# Altium PCB SUPPLY.PcbDoc
Units mil, origin at the board's own origin, x right, y up, seen from the top; angles counter-clockwise.
Board outline 4740 x 2575 mil, 2 copper layers (Top Layer, Bottom Layer); 88 components, 53 nets, 247 pads, 13 vias.
Unrouted connection lines stored in the file: 1.
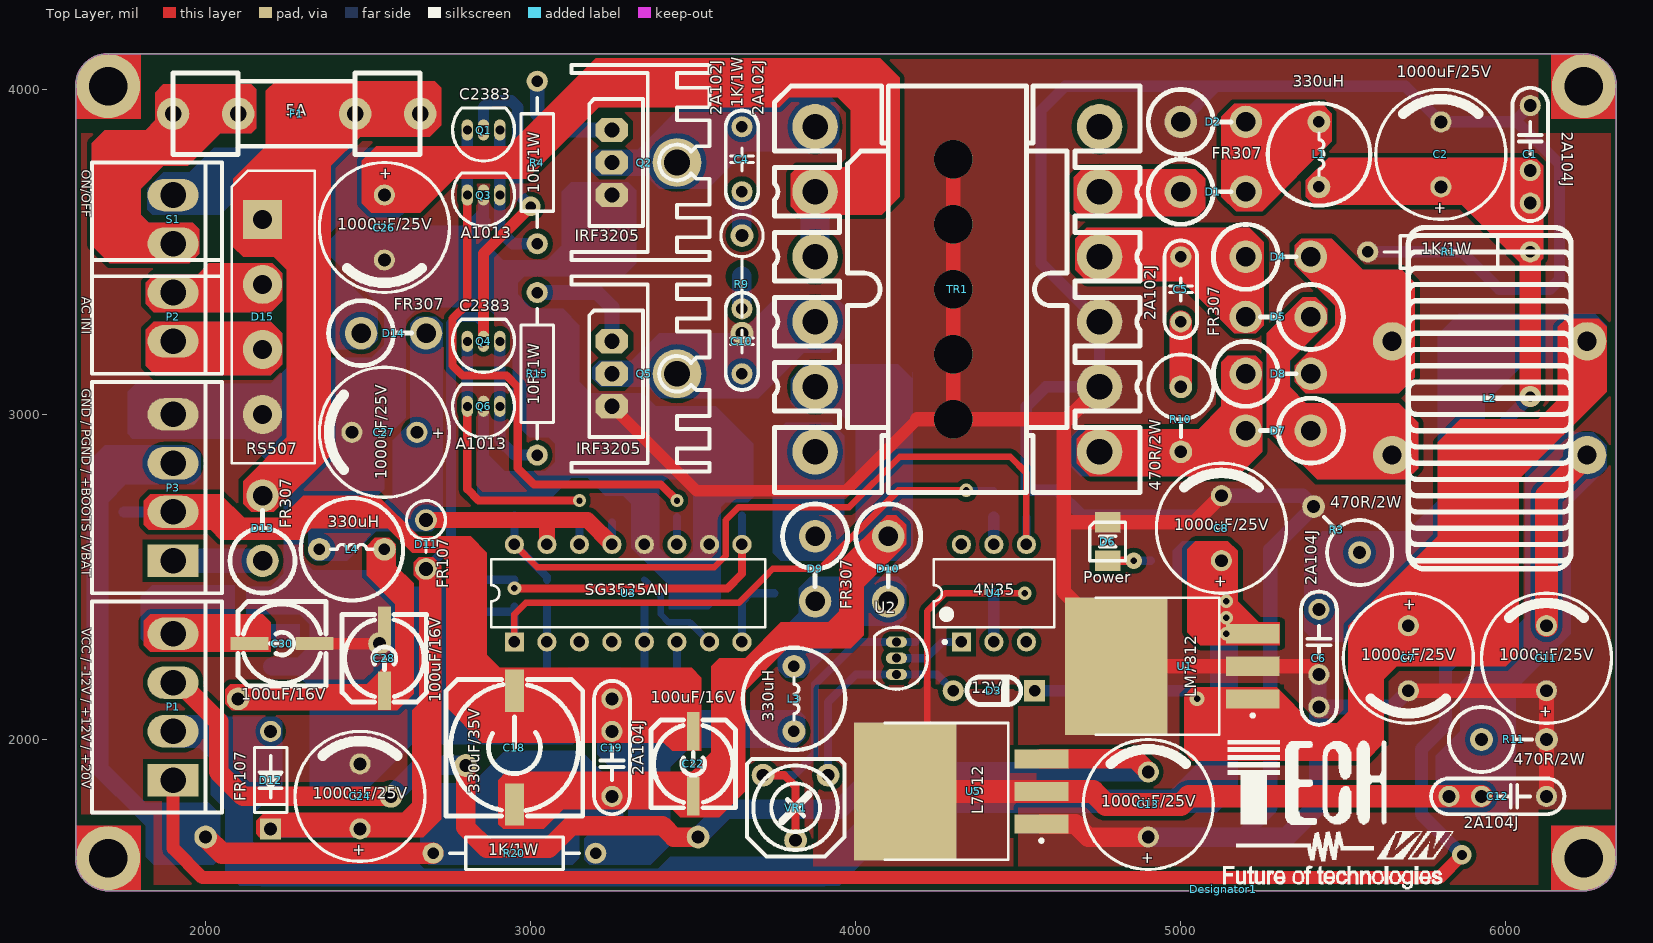
[diagram p0: Top Layer view]
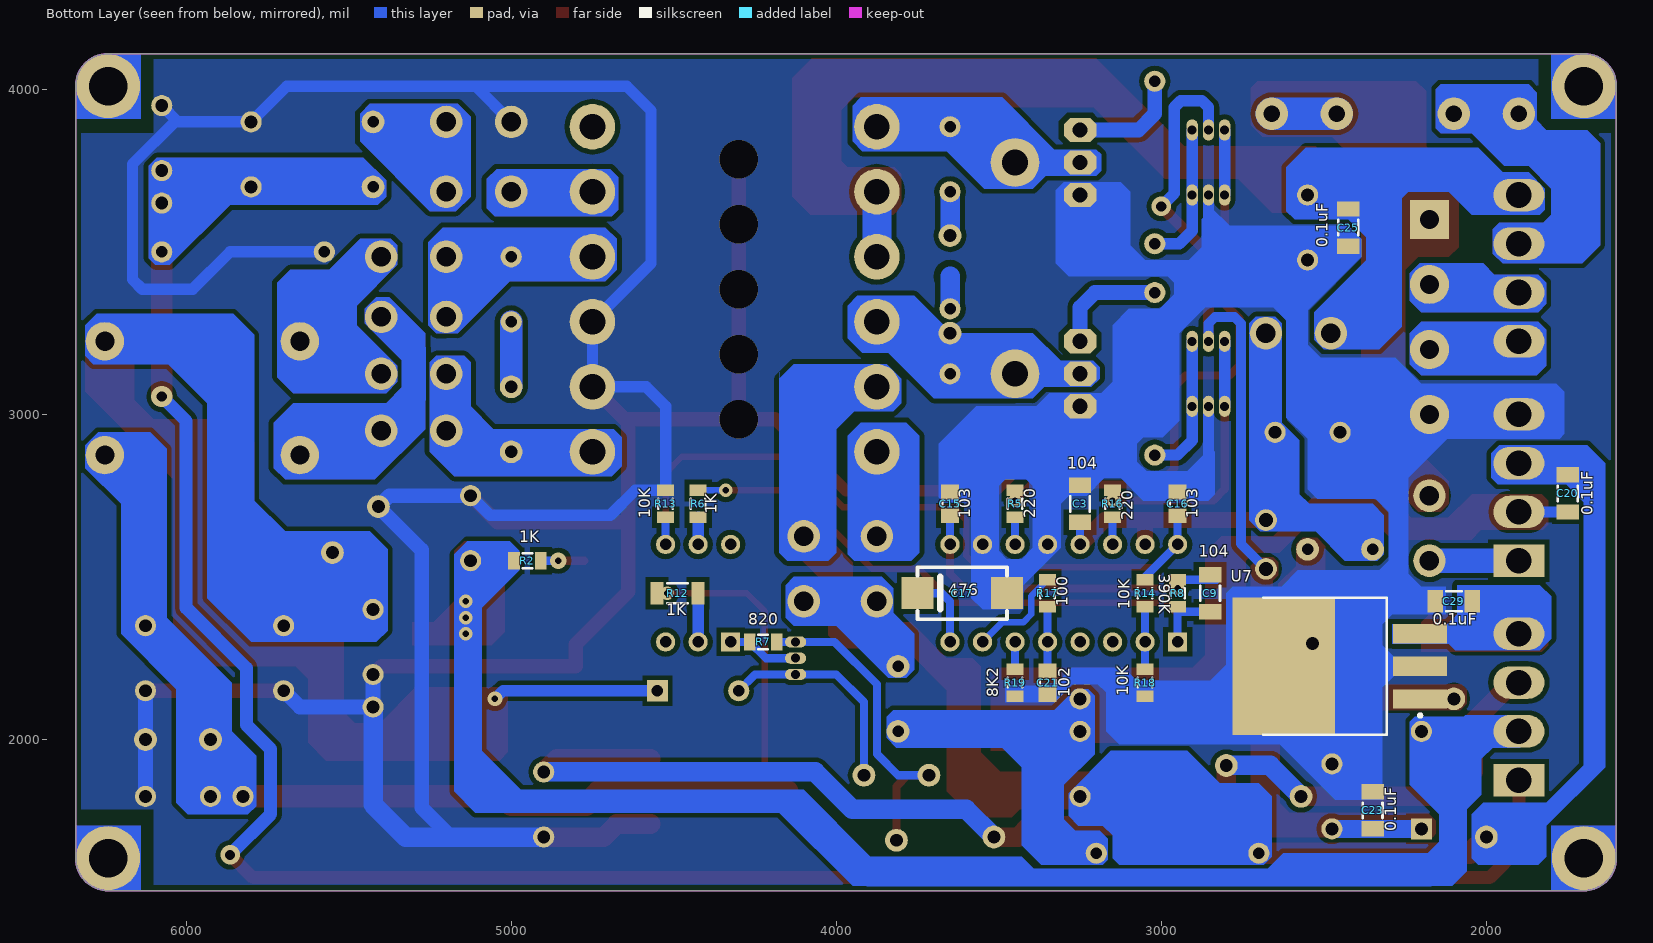
[diagram p1: Bottom Layer view, seen from below]

## Layer stack, top to bottom
Top Layer: signal copper 1.4
Dielectric: dielectric 12.6, FR-4, Dk 4.8
Bottom Layer: signal copper 1.4

## Board outline
1600,1635 1600,4010 cw(c1700,4010) 1700,4110 6240,4110 cw(c6240,4010) 6340,4010 6340,1635 cw(c6240,1635) 6240,1535 1700,1535 cw(c1700,1635)

## Design rules (kind name [scope] priority, off if disabled: settings)
Clearance [All] p1: gap=6
HoleSize [All] p1: absolutevalues=TRUE maxlimit=10000 minlimit=1 maxpercent=80.000 minpercent=20.000
HoleToHoleClearance [All] p1: gap=0 allowstackedmicrovias=TRUE
MinimumSolderMaskSliver [All] p1: minsoldermaskwidth=0
PlaneClearance [All] p1: clearance=10
PlaneConnect [All] p1: planeconnectstyle=Direct reliefexpansion=20 reliefentries=4 reliefconductorwidth=10 reliefairgap=10
PolygonConnect [All] p1: connectstyle=Direct reliefconductorwidth=50 reliefentries=4 polygonreliefangle="90 Angle"
RoutingVias [All] p1: holewidth=28 width=50 viastyle="Through Hole" minholewidth=28 minwidth=20 maxholewidth=100 maxwidth=1000
SilkToSilkClearance [All] p1: silktosilkclearance=0
SilkscreenOverComponentPads [All] p1: minsilkscreentomaskgap=0
SolderMaskExpansion SolderMaskExpansion_Via [IsVia] p1: expansion=-30
SolderMaskExpansion [All] p2: expansion=1.5
TestPointUsage [All] p1: valid=0 allowmultiple=FALSE
Testpoint [All] p1: side=3 testpointundercomponent=TRUE minsize=40 maxsize=100 preferedsize=60 minholesize=0 maxholesize=40 preferedholesize=32 testpointgrid=1 style=297 order=0123456789
Width [All] p1: maxlimit=10000 minlimit=8 preferedwidth=10
17 further rules are at their usual default settings.

## Components (designator, comment, footprint, x,y, rotation, side; value= is the part's Value field where it differs from the comment)
C1 "2A104J" CAP2/3 6075,3950 r270 top
C2 "1000uF/25V" C-400 5800,3800 r270 top
C3 "104" C1206 3250,2725 r270 bottom
C4 "2A102J" CAP200 3650,3685 r180 top
C5 "2A102J" CAP200 5000,3285 r180 top
C6 "2A104J" CAP2/3 5425,2400 r270 top
C7 "1000uF/25V" C-400 5700,2250 r90 top
C8 "1000uF/25V" C-400 5125,2650 r270 top
C9 "104" C1206 2850,2450 r270 bottom
C10 "2A102J" CAP200 3650,3125 r180 top
C11 "1000uF/25V" C-400 6125,2250 r270 top
C12 "2A104J" CAP2/3 6125,1825 r180 top
C13 "1000uF/25V" C-400 4900,1800 r270 top
C15 "103" C0805 3650,2725 r270 bottom
C16 "103" C0805 2950,2725 r270 bottom
C17 "476" C107-SMD 3750,2450 r0 bottom
C18 "330uF/35V" CAP-100UF/63V 2950,2150 r270 top
C19 "2A104J" CAP2/3 3250,1825 r90 top
C20 "0.1uF" C1206 1750,2757.09 r90 bottom
C21 "102" C0805 3350,2175 r90 bottom
C22 "100uF/16V" CAP-100UF/16V 3500,2025 r270 top
C23 "0.1uF" C1206 2350,1782.09 r90 bottom
C24 "1000uF/25V" C-400 2475,1825 r270 top
C25 "0.1uF" C1206 2425,3575 r270 bottom
C26 "1000uF/25V" C-400 2550,3575 r90 top
C27 "1000uF/25V" C-400 2550,2945 r0 top
C28 "100uF/16V" CAP-100UF/16V 2550,2150 r90 top
C29 "0.1uF" C1206 2100,2425 r0 bottom
C30 "100uF/16V" CAP-100UF/16V 2135,2295 r0 top
D1 "FR307" FR307 5000,3685 r0 top
D2 "FR307" FR307 5000,3900 r0 top
D3 "12V" 1N4148 4300,2150 r0 top
D4 "FR307" FR307 5200,3485 r0 top
D5 "FR307" FR307 5400,3300 r180 top
D6 "Power" LED-1206/100x100 4775,2550 r90 top
D7 "FR307" FR307 5400,2950 r180 top
D8 "FR307" FR307 5200,3125 r0 top
D9 "FR307" FR307 3875,2625 r270 top
D10 "FR307" FR307 4100,2625 r270 top
D11 "FR107" DIODE-1A/150 2678,2675 r270 top
D12 "FR107" DIODE-1A/300 2200,2025 r270 top
D13 "FR307" FR307 2175,2550 r90 top
D14 "FR307" FR307 2478,3250 r0 top
D15 "RS507" DB-5A 2175,3300 r270 top
Designator1 "Comment" ? 5130,1540 r0 top
F1 "5A" FUSE-AC 2100,3925 r0 top
L1 "330uH" L-330uH 5425,3900 r270 top
L2 "Trans Cupl" IDN-FILTER 5950,3050 r90 top
L3 "330uH" L-330uH 3810,2225 r270 top
L4 "330uH" L-330uH 2350,2585 r0 top
P1 "Header 4" H4-15A 1900,1875 r0 top
P2 "Header 2" H2-15A 1900,3225 r90 top
P3 "Header 4" H4-15A 1900,2550 r0 top
Q1 "C2383" TO-92 2855,3875 r180 top
Q2 "IRF3205" TO-220HSN 3250,3875 r270 top
Q3 "A1013" TO-92 2855,3675 r180 top
Q4 "C2383" TO-92 2855,3225 r180 top
Q5 "IRF3205" TO-220HSN 3250,3225 r270 top
Q6 "A1013" TO-92 2855,3025 r180 top
R1 "1K/1W" RES-500 6075,3500 r180 top
R2 "1K" R0805 4950,2550 r0 bottom
R3 "470R/2W" RES-2W/200 5550,2575 r135 top
R4 "10R/1W" RES-500 3020,3525 r90 top
R5 "220" R0805 3450,2725 r270 bottom
R6 "1K" R0805 4425,2725 r270 bottom
R7 "820" R0805 4225,2300 r0 bottom
R8 "390K" R0805 2950,2450 r270 bottom
R9 "1K/1W" RES-1W/110 3650,3550 r270 top
R10 "470R/2W" RES-2W/200 5000,3085 r270 top
R11 "470R/2W" RES-2W/200 5925,2000 r0 top
R12 "1K" R1206 4487.99,2450 r180 bottom
R13 "10K" R0805 4525,2725 r270 bottom
R14 "10K" R0805 3050,2450 r90 bottom
R15 "10R/1W" RES-500 3020,2875 r90 top
R16 "220" R0805 3150,2725 r270 bottom
R17 "100" R0805 3350,2450 r270 bottom
R18 "10K" R0805 3050,2175 r90 bottom
R19 "8K2" R0805 3450,2175 r90 bottom
R20 "1K/1W" RES-500 3200,1650 r180 top
S1 "SW-SPST" H2-15A 1900,3525 r90 top
TR1 "TR3/5" TRANS3/5 3875,3885 r0 top
U1 "LM7812" "DDPAK/TO-263 (KTT)" 4975,2225 r180 top
U2 "TL431" TO-92 4125,2250 r270 top
U3 "SG3525AN" 648-06 3300,2450 r0 top
U4 "4N35" DIP-6/300 4425,2450 r90 top
U5 "L7912" "DDPAK/TO-263 (KTT)" 4325,1840 r180 top
U7 "LM7805" "DDPAK/TO-263 (KTT)" 2450,2225 r0 bottom
VR1 "100K" VR-S 3715,1890 r0 top

## Footprints (in the part's own frame and the unit in brackets; to place one, negate y for a bottom-side part, rotate by r counter-clockwise, add the part's x,y. Pads: shape width x height; smd on the part's side, far side on the other; paste and mask are expansions set on the pad)
1N4148 [mil]
  round 65 hole 35.43: 1(0,0)
  rect 65x65 hole 35.43: 2(250,0)
  silkscreen extent 42,-43 208,43
648-06 [mm] "DIP; 16 Leads; Row Spacing 7.62 mm; Pitch 2.54 mm"
  rect 1.5x1.5 hole 0.9: 1(-8.89,-3.81)
  round 1.5 hole 0.9: 2(-6.35,-3.81) 3(-3.81,-3.81) 4(-1.27,-3.81) 5(1.27,-3.81) 6(3.81,-3.81) 7(6.35,-3.81) 8(8.89,-3.81) 9(8.89,3.81) 10(6.35,3.81) 11(3.81,3.81) 12(1.27,3.81) 13(-1.27,3.81) 14(-3.81,3.81) 15(-6.35,3.81) 16(-8.89,3.81)
  silkscreen extent -10.7,-2.65 10.7,2.65
C107-SMD [mm]
  rect 2.5x2.5 smd: 1(0,0) 2(-6.985,0)
  silkscreen extent -6.98,-2.03 0,2.03
C0805 [mm] "Chip Capacitor, 2-Leads, Body 2.0x1.3mm, IPC Medium Density"
  rect 1.15x1.4 smd: 1(-0.925,0) 2(0.925,0)
  silkscreen extent -0.22,-0.6 0.23,0.6, body extent -1,-0.63 1,0.63, height 0.85
C1206 [mm] "Chip Capacitor, 2-Leads, Body 3.2x1.6mm, IPC Medium Density"
  rect 1.2x1.75 smd: 1(-1.45,0) 2(1.45,0)
  silkscreen extent -0.6,-0.77 0.6,0.77, body extent -1.6,-0.8 1.6,0.8, height 1.6
C-400 [mil]
  round 65 hole 39.37: 1(100,0) 2(-100,0)
  silkscreen extent -200,-200 200,200
CAP2/3 [mil]
  round 65 hole 39.37: 1(0,0) 2(200,0) 2(300,0)
  silkscreen extent -55,-55 355,55
CAP200 [mil]
  round 65 hole 35.43: 1(0,0) 2(0,-200)
  silkscreen extent -50,-250 50,50
CAP-100UF/16V [mm] "Capacitor 100uF 16V SMD"
  rect 3x1 smd: 1(0,0) 2(5.08,0)
  silkscreen extent -0.89,-3.3 5.97,3.3
CAP-100UF/63V [mil] "Capacitor 100uF63V SMD"
  rect 130x59 smd: 1(0,0) 2(350,0)
  silkscreen extent -35,-210 385,210
DB-5A [mil]
  rect 120x120 hole 59.06 paste+0: 1(-300,0)
  round 120 hole 59.06 paste+0: 2(-100,0) 3(100,0) 4(300,0)
  silkscreen extent -450,-95 450,160
"DDPAK/TO-263 (KTT)" [mm] "D2-PAK, 4-Pads, Body 9.6x10.7mm (max), IPC Medium Density"
  rect 4.2x1.5 smd: 1(-6.25,2.54) 2(-6.25,0) 3(-6.25,-2.54)
  rect 8x10.75 smd: 4(4.4,0)
  silkscreen extent -6.38,-5.35 6,5.35, body extent -3.65,-5.33 6,5.33, height 4.83
DIODE-1A/150 [mm]
  round 1.7 hole 1.1: 1(0,0) 2(3.81,0)
  silkscreen extent -1.52,-1.52 2.54,1.52
DIODE-1A/300 [mil]
  round 65 hole 39.37: 1(0,0)
  rect 65x65 hole 39.37: 2(300,0)
  silkscreen extent 50,-50 250,50
DIP-6/300 [mm] "DIP, 6-Pin, Row Spacing 7.62 mm, Pitch 2.54 mm"
  rect 1.5x1.5 hole 0.9: 1(-3.81,2.54)
  round 1.5 hole 0.9: 2(-3.81,0) 3(-3.81,-2.54) 4(3.81,-2.54) 5(3.81,0) 6(3.81,2.54)
  silkscreen extent -3.93,-4.7 2.65,4.7, body extent -3.55,-4.7 3.55,4.7, height 5.46
FR307 [mil]
  round 100 hole 60: 1(0,0) 2(200,0)
  silkscreen extent -100,-100 155,100
FUSE-AC [mm]
  round 2.54 hole 1.3: 1(-5.08,0) 1(0,0) 2(9.144,0) 2(14.224,0)
  silkscreen extent -5.08,-3.17 14.22,3.17
H2-15A [mm]
  oval 2.54x4 hole 2: 1(0,0) 2(3.81,0)
  silkscreen extent -2.54,-3.81 6.35,6.35
H4-15A [mm]
  rect 4x2.54 hole 2: 1(0,0)
  oval 4x2.54 hole 2: 2(0,3.81) 3(0,7.62) 4(0,11.43)
  silkscreen extent -6.35,-2.54 3.81,13.97
IDN-FILTER [mm]
  round 3 hole 1.5: 1(-4.445,7.62) 2(-4.445,-7.62) 3(4.445,7.62) 4(4.445,-7.62)
  silkscreen extent -13.33,-6.35 13.33,6.35
L-330uH [mil]
  round 70 hole 35.43: 1(0,0) 2(200,0)
  silkscreen extent -57,-157 257,157
LED-1206/100x100 [mm]
  rect 1.6x2 smd: 1(0,0) 2(3,0)
  silkscreen extent 0,-1.4 3,1.4, body extent -0.25,-1.4 3.25,1.3, height 1.95
R0805 [mm] "Chip Resistor, 2-Leads, Body 2.0x1.3mm, IPC Medium Density"
  rect 0.9x1.35 smd: 1(-1.05,0) 2(1.05,0)
  silkscreen extent -0.38,-0.58 0.38,0.58, body extent -1,-0.63 1,0.63, height 0.6
R1206 [mm] "Chip Resistor, 2-Leads, Body 3.2x1.6mm, IPC Medium Density"
  rect 1x1.75 smd: 1(-1.6,0) 2(1.6,0)
  silkscreen extent -0.8,-0.77 0.8,0.77, body extent -1.6,-0.8 1.6,0.8, height 0.6
RES-1W/110 [mil]
  round 70 hole 39.37: 1(0,0) 2(300,0)
  silkscreen extent -65,-65 250,65
RES-2W/200 [mil]
  round 70 hole 39.37: 1(0,0) 2(200,0)
  silkscreen extent -100,-100 155,100
RES-500 [mil]
  round 65 hole 35.43: 1(0,0) 2(500,0)
  silkscreen extent 50,-50 450,50
TO-92 [mil]
  oval 35x65 hole 27.56 paste+0: 1(-50,0) 2(0,0) 3(50,0)
  silkscreen extent -95,-68 95,95
TO-220HSN [mm]
  oct 1.905x2.54 hole 1.2: 1(0,0) 2(2.54,0) 3(5.08,0)
  round 3.81 hole 2: 2(2.54,5.08)
  silkscreen extent -5.08,-3.18 10.16,7.62
TRANS3/5 [mil] "Transfomer Supply"
  round 140 hole 78.74: 1(0,0) 2(0,-200) 3(0,-400) 4(0,-600) 5(0,-800) 6(0,-1000) 7(875,-1000) 8(875,-800) 9(875,-600) 10(875,-400) 11(875,-200) 12(875,0)
  silkscreen extent -125,-1125 1000,125
VR-S [mil]
  round 70 hole 39.37: 1(0,0) 2(200,0) 3(100,-200)
  silkscreen extent -50,-250 250,50
? [mil]
  silkscreen extent 0,0 708,458

## Part data
C1 C3 C4 C5 C6 C9 C10 C12 C15 C16 C19 C20 C21 C23 C25 C29: library part Cap, "Capacitor"
C2 C7 C8 C11 C13 C17 C18 C22 C24 C26 C27 C28 C30: library part "Cap Pol1", "Polarized Capacitor (Radial)"
D1 D2 D4 D5 D7 D8 D9 D10 D11 D12 D13 D14: library part "Diode 1N4148", "High Conductance Fast Diode"
D3: library part "D Zener", "Zener Diode"
D6: library part LED0, "Typical INFRARED GaAs LED"
D15: library part Bridge1, "Full Wave Diode Bridge"
F1: library part "Fuse 1", "Fuse"
L1 L3: library part "Inductor Iron", "Magnetic-Core Inductor"
L2: "Transformer (Coupled Inductor Model)"
L4: library part Inductor, "Inductor"
P1 P3: "Header, 4-Pin"
P2: "Header, 2-Pin"
Q1 Q4: library part 2N3904, "NPN General Purpose Amplifier"
Q2 Q5: "HEXFET Power MOSFET"
Q3 Q6: library part 2N3906, "PNP General Purpose Amplifier"
R1 R2 R3 R4 R5 R6 R7 R8 R9 R10 R11 R12 R13 R14 R15 R16 R17 R18 R19 R20: library part Res1, "Resistor"
S1: "Single-Pole, Single-Throw Switch"
TR1: library part TRANS3/5, "Transformer power supply for accu recovery"
U1 U7: library part MC7805CT, "3-Terminal Positive Fixed Voltage Regulator"
U2: library part TL431ACLP, "Programmable Precision Reference"
U3: "Pulse Width Modulator Control Circuit"
U5: library part L7912CD2T, "IC REG NEG VOLT 12V D2PAK"
VR1: library part RPot, "Potentiometer"

## Free pads (board coordinates)
  round 196.85 hole 118.11: 0(1700,1635) 0(1700,4010) 0(6240,1635) 0(6240,4010)
  round 118.11 hole 118.11: 0(4300,3785) 1(4300,3585) 2(4300,3385) 3(4300,3185) 4(4300,2985)
  round 70 hole 39.37: 1(2100,2125) 2(2535,2295) 3(2570,1825) 4(2800,1920) 5(3515,1700) 6(2000,1700)

## Via types
v1: diameter 42, hole 19.68, Top Layer to Bottom Layer, 6 vias
v2: diameter 60, hole 31.5, Top Layer to Bottom Layer, 2 vias
v3: diameter 40, hole 19.68, Top Layer to Bottom Layer, 2 vias
v4: diameter 45, hole 19.68, Top Layer to Bottom Layer, 1 vias
v5: diameter 50, hole 19.68, Top Layer to Bottom Layer, 1 vias
v6: diameter 65, hole 31.5, Top Layer to Bottom Layer, 1 vias

## Nets (pads, with @x,y where several pads share a name; then routed paths per layer and width w, separated by ;. In a path a pad name is that pad's centre, name@x,y a point inside that pad or via, vN(x,y) a via of type N, cw(c..) or ccw(c..) an arc to the next point about the centre after c; other vN are vias at no path point)
+12V: C8.1 D12.1 P1.2 R2.2 U1.3 | length 4884.7
  Top Layer w55: v1@5125,2320 C8.1
  Bottom Layer w35: R2.2 C8.1
  Bottom Layer w55: 2100,2025 2090,2015 2090,1660 2175,1575 3900,1575 4140,1815 5035,1815 5125,1905 C8.1
  Bottom Layer w70: P1.2 2100,2025 D12.1
  other v1: 5140,2325 5140,2375 5140,2425
+20V: C1.2 C2.1 L1.2 P1.1 R1.1 | length 7444.5
  Top Layer w40: P1.1 1900,1665 1990,1575 5795,1575 v2(5865,1645)
  Top Layer w65: v6(6075,3055) R1.1 6075,3650 C1.2@6075,3750
  Bottom Layer w40: v2(5865,1645) 5740,1770 5740,1970 5815,2045 5815,2220 6000,2405 6000,2980 v6(6075,3055) ; v6@6082.5,3047.5 v6@6085,3050
  Bottom Layer w65: L1.2 C2.1 6065,3700 6075,3710 ; R1.1 6075,3650 6075,3710 ; C1.2@6075,3750 6075,3710
+BOOST: C18.1 C19.2 C20.1 C22.1 L3.2 P3.2 R20.1 | length 3413.7
  Top Layer w45: C19.2@3250,2025 C22.1
  Top Layer w50: 2480,2700 2545,2700 2645,2600 2735,2600 2785,2550 2785,2270 2995,2060 3030,2025 C19.2@3250,2025
  Top Layer w65: P3.2 2030,2700 2080,2650 2255,2650 2305,2700 2480,2700 2525,2700
  Bottom Layer w35: C20.1 P3.2
  Bottom Layer w45: R20.1 3280,1650 3325,1695 3325,2025 ; C19.2@3250,2125 3250,2025 3325,2025 ; L3.2 3325,2025
+FB: C6.1 C7.1 D3.2 L2.4 R3.1 U1.1 | length 4545.6
  Top Layer w35: v4(5050,2125) U1.1
  Top Layer w58: U1.1 5260,2125 5375,2010 5510,2010 5560,2060 5560,2300 5610,2350 C7.1 5865,2350 5955,2440 5955,2795 6250,3090 L2.4
  Bottom Layer w35: D3.2 5025,2150 v4(5050,2125)
  Bottom Layer w75: R3.1 5480,2575 5425,2520 C6.1 5475,2350 C7.1 5775,2350 5880,2455 5880,3105 6000,3225 L2.4
+VBB: C3.2 C27.1 D11.1 D14.2 L4.1 U3.13 U3.15 | length 1686.6
  Top Layer w50: D11.1 3045,2675 ; U3.15 3050,2670 3045,2675 ; U3.13 3175,2675 3045,2675
  Bottom Layer w25: U3.13 C3.2
  Bottom Layer w70: L4.1 2443,2678 2678,2678 D14.2
-12V: C13.2 P1.3 pad.3@2570,1825 pad.4@2800,1920 pad.5 U5.3 | length 3963.9
  Top Layer w60: P1.3 1920,2175 2040,2055 2040,1900 2115,1825 pad.3@2570,1825 ; pad.4@2800,1920 2800,1730 2865,1665 3055,1665 3125,1735 3405,1735 3440,1700 pad.5 ; U5.3 4860,1940 C13.2
  Bottom Layer w60: pad.3@2570,1825 2665,1920 pad.4@2800,1920 ; pad.5 3600,1785 3950,1785 4065,1900 C13.2
-FB: C11.2 C12.2 L2.2 R11.1 R12.1 U5.2 U5.4 | length 4567.6
  Top Layer w20: U5.4 4220,1908.23 4220,2395 4275,2450 v1(4520,2450)
  Top Layer w70: U5.4 U5.2 4730,1840 4770,1800 5000,1800 5025,1825 5825,1825 C12.2@5925,1825 ; C11.2 6125,2750 L2.2
  Bottom Layer w75: C12.2@5825,1825 5925,1825 R11.1 5925,2150 C11.2 6125,2750 L2.2
GND: C1.1 C2.2 C3.1 C6.2 C7.2 C8.2 C11.1 C12.1 C13.1 C15.1 C16.1 C17.2 C21.1 C23.2 C24.2 C25.2 C26.2 C27.2 C28.2 C29.2 C30.2 D2.1 D6.2 D15.4 P3.4 pad.0@4300,3785 pad.1@4300,3585 pad.2 pad.3@4300,3185 pad.4@4300,2985 Q2.3 Q3.2 Q5.3 Q6.2 R1.2 R3.2 R11.2 R13.1 R18.1 R19.1 TR1.8 TR1.9 U1.2 U1.4 U3.10 U3.12 U5.1 U7.2 U7.4 | length 22033.3
  Top Layer w35: C30.2 C28.2@2550,2295 ; Q5.3 3510,2765 3970,2765 4190,2985
  Top Layer w45: 4190,2985 pad.4@4300,2985 ; pad.0@4300,3785 4300,3585 4300,3385 4300,3185 pad.4@4300,2985 ; TR1.8 4650,2985 ; C8.2 5043.11,2668.11 D6.2 4648.11,2668.11 4640,2660 ; C6.2@5425,2200 5400,2225 U1.2 U1.4 4801.77,2293.23 4640,2455 4640,2660 ; C7.2 C11.1 R11.2 C12.1 ; pad.4@4300,2985 4650,2985 ; 4640,2660 4640,2975 4650,2985
  Top Layer w60: U5.1 4675,1740 4715,1700 C13.1
  Bottom Layer w20: U7.4 2783.23,2065 2981.34,2065 R18.1 3101.34,2185 3290,2185 3341.34,2133.66 R19.1
  Bottom Layer w35: C29.2 2310,2425 2322.5,2437.5 ; C23.2 2449.17,1839.17 2475,1865 C24.2 2475,2076.77 U7.4 ; C25.2 2507.09,3517.91 C26.2 2575,3450 ; C27.2 2575,3070 2575,3450 ; Q6.2 2855,2795 2888.58,2761.42 C16.1 3021.42,2761.42 3085,2825 3207.09,2825 C3.1 ; Q3.2 2855,3450 ; Q2.3 3250,3500 3200,3450 2855,3450 ; U3.12 3350,2755 3322.91,2782.09 C3.1 ; C17.2 3550,2525 U3.10 3550,2725 ; C15.1 3586.42,2761.42 3550,2725 ; D2.1 5110,4010 ; C8.2 5065,2690 4695,2690 4618.66,2766.34 R13.1 4525,3025 4585,3085 TR1.8 TR1.9 4570,3465 4570,3935 4645,4010 5110,4010 ; R1.2 5865,3500 5980,3385 6135,3385 6165,3415 6165,3770 6035,3900 6025,3900 ; C1.1 6025,3900 ; 2575,3450 2815,3450 ; 2815,3450 2855,3450 ; 2815,3450 3010,3255 3010,3090 3075,3025 Q5.3 ; C3.1 Q5.3 ; Q5.3 3345,3025 3520,2850 3550,2850 3550,2725 ; 5110,4010 5690,4010 C2.2 6025,3900
  Bottom Layer w45: C8.2 5375,2750 R3.2 5275,2582.84 5275,1790 5185,1700 ; C6.2@5425,2200 5425,2100 5650,2100 C7.2 ; C12.1 R11.2 C11.1
  Bottom Layer w55: U7.2 2370,2225 ; 2285,3000 2270,2985 2270,2490 2322.5,2437.5 2370,2390 2370,2225 ; U7.4 2370,2225
  Bottom Layer w60: C13.1 5185,1700 5325,1700 5425,1800 C6.2@5425,2100
  Bottom Layer w100: P3.4 D15.4 2285,3000 2395,3000 C27.2
NetC4_1: C4.1 R9.1 | length 135
  Bottom Layer w60: R9.1 C4.1
NetC4_2: C4.2 Q2.2 TR1.1 | length 670.6
  Bottom Layer w75: Q2.2@3250,3775 3450,3775 3560,3885 C4.2 TR1.1
NetC5_1: C5.1 R10.1 | length 400
  Top Layer w70: R10.1 C5.1
  Bottom Layer w70: R10.1 C5.1
NetC5_2: C5.2 D4.1 D5.2 TR1.10 | length 635
  Bottom Layer w75: TR1.10 C5.2 D4.1 D5.2
NetC9_1: C9.1 C15.2 R8.1 U3.9 | length 1017.2
  Top Layer w25: v1(2950,2465) 3605,2465 3650,2510 U3.9
  Bottom Layer w25: C9.1@2830,2491.34 R8.1 ; U3.9 C15.2
NetC9_2: C9.2 R6.1 R8.2 U3.1 | length 1918.7
  Top Layer w20: U3.1 2950,2385 2985,2420 3640,2420 3720,2500 3745,2525 3890,2525 4131.34,2766.34 v1(4340,2766.34)
  Bottom Layer w20: v1(4340,2766.34) R6.1
  Bottom Layer w25: C9.2 R8.2@2942.09,2392.91 ; U3.1 R8.2
NetC10_1: C10.1 Q5.2 TR1.4 | length 691.3
  Bottom Layer w75: Q5.2@3250,3125 3450,3125 C10.1 3715,3125 TR1.4
NetC10_2: C10.2 R9.2 | length 100
  Bottom Layer w60: C10.2 3650,3425
NetC16_2: C16.2 R13.2 R14.2 U3.16 U4.4 | length 2372.3
  Top Layer w20: U3.16 3020,2530 3565,2530 3600,2565 3600,2675 3640,2715 3980,2715 4135,2870 4475,2870 4525,2820 U4.4
  Bottom Layer w25: C16.2 U3.16 3050,2500 R14.2 ; U4.4 R13.2
NetC17_1: C17.1 U3.8 | length 235.4
  Bottom Layer w25: U3.8 3650,2425 3675,2450 C17.1
NetC21_2: C21.2 R17.2 U3.5 | length 197.2
  Bottom Layer w25: C21.2 U3.5 R17.2
NetC28_1: C28.1 L4.2 pad.1@2100,2125 U7.1 | length 953.8
  Top Layer w55: pad.1@2100,2125 2540,2125 2610,2195 2610,2450 2550,2510 L4.2
NetD1_1: D1.1 TR1.11 | length 250
  Bottom Layer w100: TR1.11 D1.1
NetD1_2: D1.2 D2.2 L1.1 | length 440
  Bottom Layer w65: D1.2 D2.2 L1.1
NetD3_1: D3.1 U2.3 VR1.2 | length 665.9
  Bottom Layer w25: VR1.2 3915,2115 4000,2200 U2.3 4250,2200 D3.1
NetD4_2: D4.2 D8.2 L2.3 | length 719.4
  Bottom Layer w75: D8.2 5550,3125 L2.3 5650,3345 5605,3390 5495,3390 D4.2
NetD5_1: D5.1 D7.1 L2.1 | length 713.9
  Bottom Layer w75: D5.1 5300,3200 5300,3050 D7.1 5475,2875 L2.1
NetD6_1: D6.1 R2.1 | length 133.7
  Top Layer w25: D6.1 v5(4855,2550)
  Bottom Layer w25: v5(4855,2550) R2.1
NetD7_2: D7.2 D8.1 R10.2 TR1.7 | length 651.9
  Bottom Layer w75: TR1.7 R10.2 5135,2885 D7.2 D8.1
NetD9_1: D9.1 TR1.6 | length 260
  Bottom Layer w90: D9.1 TR1.6
NetD9_2: D9.2 D10.2 L3.1 | length 451.9
  Bottom Layer w65: L3.1 3875,2290 D9.2 D10.2
NetD13_2: D13.2 D15.1 F1.2 | length 1875.9
  Top Layer w100: D13.2 2325,2900 2325,3450 D15.1 2175,3740 2360,3925 2460,3925 F1.2@2660,3925
  Bottom Layer w100: F1.2@2460,3925 F1.2@2660,3925
NetD15_2: D15.2 P2.2 | length 285.4
  Bottom Layer w100: P2.2 2045,3375 2070,3400 D15.2
NetD15_3: D15.3 P2.1 | length 285.4
  Bottom Layer w100: P2.1 2045,3225 2070,3200 D15.3
NetF1_1: F1.1 S1.1 | length 801.1
  Bottom Layer w100: S1.1 1790,3525 1735,3580 1735,3700 1900,3865 1900,3925 F1.1@2100,3925
NetQ1_1: Q1.1 Q3.1 R4.1 | length 441.6
  Bottom Layer w35: Q1.1 Q3.1 2905,3565 2945,3525 R4.1
NetQ1_3: Q1.3 Q3.3 R5.1 | length 1752
  Top Layer w25: Q3.3 2805,3340 2760,3295 2760,3150 2790,3120 2925,3120 2960,3085 2960,2835 3010,2785 3400,2785 v3(3450,2735)
  Bottom Layer w35: Q3.3 Q1.3
NetQ2_1: Q2.1 R4.2 | length 350.7
  Bottom Layer w45: R4.2 3020,3925 3070,3875 Q2.1
NetQ4_1: Q4.1 Q6.1 R15.1 | length 438.6
  Bottom Layer w35: Q4.1 Q6.1 2905,2920 2950,2875 R15.1
NetQ4_3: Q4.3 Q6.3 R16.1 | length 814.5
  Top Layer w25: Q6.3 2805,2770 2840,2735 v3(3150,2735)
  Bottom Layer w35: Q6.3 Q4.3
NetQ5_1: Q5.1 R15.2 | length 353.6
  Bottom Layer w45: R15.2 3205,3375 3250,3330 Q5.1
NetR6_2: R6.2 U4.5 | length 83.7
  Bottom Layer w35: U4.5 R6.2
NetR7_1: R7.1 U2.1 VR1.1 VR1.3 | length 1043.9
  Top Layer w25: VR1.1 3780,1890 3815,1855 VR1.3
  Bottom Layer w25: VR1.1 3810,1890 3875,1955 3875,2170 4005,2300 U2.1 R7.1
NetR7_2: R7.2 U2.2 U4.1 | length 220.7
  Bottom Layer w25: U2.2 4216.34,2250 R7.2 U4.1
NetR12_2: R12.2 U4.2 | length 150
  Bottom Layer w35: U4.2 R12.2
NetR14_1: R14.1 R18.2 U3.2 | length 192.3
  Bottom Layer w25: R18.2 U3.2 R14.1
NetR17_1: R17.1 U3.7 | length 312.3
  Bottom Layer w20: R17.1 3400,2441.34 3400,2385 3425,2360 3490,2360 U3.7
NetR19_2: R19.2 U3.6 | length 83.7
  Bottom Layer w25: R19.2 U3.6
OUTA: R5.2 U3.11 | length 83.7
  Bottom Layer w25: U3.11 R5.2
OUTB: R16.2 U3.14 | length 83.7
  Bottom Layer w25: U3.14 R16.2
PGND: C18.2 C19.1 C20.2 C22.2 D10.1 P3.3 pad.6 R20.2 TR1.5 | length 5297.3
  Top Layer w35: R20.2@2690,1640 R20.2
  Top Layer w55: C18.2@2955,1825 C19.1
  Top Layer w65: pad.6 2050,1650 R20.2 ; C19.1 C22.2 3600,1925 3600,2140 3775,2315 3925,2315 3990,2380 3990,2515 D10.1
  Bottom Layer w35: P3.3 1785.83,2850 C20.2 1680,2744.17 1680,1915 1815,1780 1975,1780 2010,1745 pad.6@2010,1700
  Bottom Layer w65: R20.2 2700,1770 2755,1825 C19.1
  Bottom Layer w90: TR1.5 4040,3085 4100,3025 D10.1
VBAT: D13.1 P3.1 | length 275
  Bottom Layer w75: P3.1 D13.1
VCC: C29.1 C30.1 P1.4 U7.3 | length 611.9
  Top Layer w38: P1.4@1930,2295 C30.1
  Bottom Layer w38: C29.1 2042.91,2332.09 2050,2325
  Bottom Layer w55: P1.4 2050,2325 U7.3
VDR: C23.1 C24.1 D11.2 D12.2 Q1.2 Q4.2 | length 3462.8
  Top Layer w35: Q4.2 2855,3495 v2(3000,3640)
  Top Layer w42: D12.2 2615,1725 2678,1788 D11.2
  Bottom Layer w30: D11.2 2755,2602 2755,3280 2775,3300 2835,3300 2855,3280 Q4.2
  Bottom Layer w35: Q1.2 2855,3945 2875,3965 2940,3965 2960,3945 2960,3680 v2(3000,3640)
  Bottom Layer w55: D12.2 C23.1 C24.1
VIN: C25.1 C26.1 D14.1 S1.2 TR1.2 TR1.3 | length 3836.7
  Top Layer w90: C26.1 2650,3775 2955,3775 3225,4045 3965,4045 4060,3950 4060,3755 3990,3685 TR1.2
  Bottom Layer w35: 2310,3517.09 C25.1 2467.91,3675 C26.1
  Bottom Layer w90: TR1.3 TR1.2
  Bottom Layer w100: S1.2@1955,3675 2010,3675 2080,3745 2305,3745 ; D14.1 2310,3418 2310,3517.09 2310,3740 2305,3745 ; C26.1 2480,3745 2305,3745
pads on no net: TR1.12 U3.3 U3.4 U4.3 U4.6

## Polygon pours and split planes (outlines as drawn)
-FB on Top Layer "Bottom Layer-No Net" (solid, remove dead copper, pour order 1000): 3870,2180 4535,2180 4565,2150 4555,2140 4555,1575 3860,1575 3870,1575
GND on Top Layer "Bottom Layer-No Net" (solid, remove dead copper, pour order 1001): 1840,4110 1840,3865 1600,3865 1600,1770 1685,1770 1840,1770 1840,1735 1840,1535 1885,1535 6100,1535 6100,1680 6100,1785 6155,1785 6340,1785 6340,1865 6340,3865 6295,3865 6100,3865 6100,3980 6100,4110
GND on Bottom Layer "Bottom Layer-No Net" (solid, remove dead copper, pour order 1002): 1840,4110 1840,3865 1600,3865 1600,1770 1685,1770 1840,1770 1840,1735 1840,1535 1885,1535 6100,1535 6100,1680 6100,1785 6155,1785 6340,1785 6340,1865 6340,3865 6295,3865 6100,3865 6100,3980 6100,4110

## Keep-outs
Keep-Out Layer:
  the board outline again, w5

## Other copper
Top Layer:
  region net NetC5_2: 5005,3410 5165,3250 5230,3250 5255,3275 5255,3530 5210,3575 4710,3575 4675,3540 4675,3445 4710,3410
  region net NetD1_1: 5050,3610 5075,3635 5075,3725 5045,3755 4695,3755 4670,3730 4670,3630 4690,3610
  region net NetD1_2: 5170,3625 5125,3670 5125,3915 5165,3955 5435,3955 5465,3925 5465,3840 5250,3625
  region net +20V: 5865,3645 6050,3460 6095,3460 6115,3480 6115,3765 6090,3790 5455,3790 5385,3720 5385,3670 5410,3645
  region net NetD7_2: 4680,2925 4680,2850 4720,2810 5175,2810 5250,2885 5250,3160 5230,3180 5145,3180 5125,3160 5125,3025 5055,2955 4710,2955
  region net NetD4_2: 5370,3540 5465,3540 5560,3445 5680,3445 5720,3405 5720,3115 5670,3065 5385,3065 5350,3100 5350,3150 5475,3275 5475,3335 5350,3460 5350,3520
  region net NetF1_1: 1825,3590 1800,3615 1800,3695 1870,3765 1945,3765 2045,3865 2140,3865 2155,3880 2155,4000 2140,4015 1870,4015 1845,3990 1845,3905 1815,3875 1690,3875 1650,3835 1650,3520 1705,3465 1950,3465 1980,3495 1980,3570 1960,3590
  region net NetD15_2: 1840,3430 1975,3430 2010,3465 2205,3465 2235,3435 2235,3350 2200,3315 1840,3315 1815,3340 1815,3405
  region net NetD15_3: 1840,3285 2200,3285 2235,3250 2235,3155 2200,3120 1845,3120 1815,3150 1815,3260
  region net NetD13_2: 2115,2725 2140,2700 2210,2700 2385,2875 2385,3765 2475,3855 2690,3855 2725,3890 2725,4005 2705,4025 2215,4025 2185,3995 2185,3825 2085,3725 2085,3515 2115,3485 2210,3485 2250,3445 2250,2930 2115,2795
  region net VIN: 2510,3620 2660,3620 2765,3725 2990,3725 3210,3945 3755,3945 3765,3945 3795,3975 3945,3975 3985,3935 3985,3780 3965,3760 3820,3760 3800,3740 3800,3640 3825,3615 4080,3615 4135,3670 4135,4035 4075,4095 3200,4095 2930,3825 2525,3825 2480,3780 2480,3650
  region net +BOOST: 2015,2645 2045,2615 2290,2615 2325,2650 2560,2650 2635,2575 2715,2575 2740,2550 2740,2100 2850,1990 3410,1990 3435,1965 3525,1965 3525,2190 3495,2220 2905,2220 2865,2260 2865,2575 2815,2625 2655,2625 2530,2750 2300,2750 2230,2680 2120,2680 2045,2755 1830,2755 1810,2735 1810,2660 1825,2645
  region net VCC: 2200,2270 2200,2360 2175,2385 1830,2385 1810,2365 1810,2290 1830,2270
  region net NetC28_1: 2060,2110 2080,2090 2590,2090 2640,2140 2640,2480 2585,2535 2585,2600 2565,2620 2520,2620 2495,2595 2495,2505 2585,2415 2585,2260 2495,2170 2075,2170 2060,2155
  region net VDR: 2155,1750 2180,1775 2605,1775 2635,1805 2635,2090 2665,2120 2665,2480 2640,2505 2640,2545 2655,2560 2700,2560 2725,2535 2725,1755 2670,1700 2165,1700 2155,1710
  region net PGND: 2915,1725 3040,1725 3100,1785 3435,1785 3460,1760 3580,1760 3660,1840 3660,2150 3790,2280 3985,2280 4025,2320 4025,2470 4155,2600 4155,2660 4125,2690 4095,2690 3950,2545 3950,2395 3915,2360 3770,2360 3660,2250 3580,2250 3555,2225 3555,1960 3495,1900 2925,1900 2900,1875 2900,1740
  region net +12V: 5305,2290 5305,2360 5240,2360 5175,2425 5175,2580 5145,2610 5045,2610 5020,2585 5020,2330 5060,2290
  region net NetD5_1: 5265,2955 5420,2800 5695,2800 5730,2835 5730,2975 5670,3035 5385,3035 5335,3085 5335,3165 5450,3280 5450,3325 5415,3360 5375,3360 5265,3250
  region net +FB: 5035,2160 5295,2160 5405,2050 5480,2050 5515,2085 5515,2350 5790,2625 5790,2915 5860,2985 6100,2985 6160,3045 6160,3270 6185,3295 6285,3295 6310,3270 6310,3070 6040,2800 6040,2265 6000,2225 5665,2225 5625,2185 5625,1990 5570,1935 5035,1935 5010,1960 5010,2135
Bottom Layer:
  region net PGND: 3130,1615 3150,1635 3150,1705 3180,1735 3255,1735 3285,1765 3285,1835 3155,1965 2920,1965 2820,1865 2700,1865 2660,1825 2660,1640 2685,1615
  region net VCC: 2095,2275 2115,2295 2290,2295 2290,2355 2120,2355 2090,2385 2090,2475 1835,2475 1800,2440 1800,2310 1835,2275
  region net +12V: 1895,2075 2065,2075 2070,2070 2220,2070 2235,2055 2235,1860 2145,1770 2145,1685 2180,1650 2625,1650 2675,1600 2725,1600 2720,1595 2785,1595 2805,1575 3365,1575 3430,1640 3895,1640 4100,1845 4970,1845 5090,1965 5090,2405 4975,2520 4975,2580 5005,2610 5135,2610 5175,2570 5175,1840 5110,1775 4175,1775 3950,1550 2105,1550 2060,1595 2060,1785 2015,1830 2015,1940 1980,1975 1895,1975
  region net PGND: 1755,2785 1700,2730 1700,1920 1815,1805 2010,1805 2045,1770 2045,1635 2025,1615 1840,1615 1815,1640 1815,1735 1635,1915 1635,2850 1690,2905 1960,2905 1985,2880 1985,2805 1965,2785
  region net +BOOST: 3265,2155 3330,2090 3825,2090 3845,2070 3845,2005 3815,1975 3490,1975 3430,1915 3430,1675 3370,1615 3180,1615 3165,1630 3165,1695 3190,1720 3265,1720 3300,1755 3300,1860 3205,1955 3205,2135 3225,2155
  region net NetD9_2: 3825,2390 3760,2325 3760,2215 3785,2190 3840,2190 4000,2350 4130,2350 4155,2375 4155,2475 4130,2500 3860,2500 3825,2465
  region net NetC10_1: 3215,3085 3360,3085 3395,3050 3700,3050 3840,3190 3920,3190 3965,3235 3965,3335 3935,3365 3760,3365 3645,3250 3395,3250 3310,3165 3210,3165 3190,3145 3190,3110
  region net NetC4_2: 3200,3735 3355,3735 3395,3695 3545,3695 3660,3810 3920,3810 3950,3840 3950,3950 3925,3975 3490,3975 3330,3815 3200,3815 3185,3800 3185,3750
  region net GND: 1775,2925 2120,2925 2240,2805 2240,2510 2200,2470 2125,2470 2125,2385 2290,2385 2320,2355 2320,2290 2285,2255 2285,2195 2320,2160 2320,1815 2465,1815 2635,1985 3130,1985 3170,2025 3170,2145 3195,2170 3275,2170 3330,2115 3480,2115 3480,2165 3330,2165 3275,2220 3115,2220 3075,2180 2850,2180 2800,2230 2800,2450 2780,2470 2630,2470 2580,2520 2330,2520 2300,2550 2300,2700 2340,2740 2520,2740 2550,2770 2550,2925 2615,2990 2615,3290 2655,3330 2865,3330 2945,3250 2945,2980 2995,2930 3055,2930 3075,2910 3075,2855 3045,2825 2920,2825 2865,2880 2865,2900 2850,2900 2835,2885 2835,2755 2855,2735 3055,2735 3125,2805 3175,2805 3230,2750 3285,2750 3310,2725 3310,2590 3425,2475 3425,2400 3550,2400 3585,2435 3585,2580 3500,2580 3475,2555 3430,2555 3395,2590 3395,2780 3415,2800 3480,2800 3500,2780 3500,2580 3585,2580 3585,2715 3600,2730 3670,2730 3685,2745 3685,2910 3570,3025 3385,3025 3345,3065 3185,3065 3150,3100 3150,3275 3100,3325 3005,3325 2960,3370 2960,3405 2980,3425 3285,3425 3325,3465 3325,3690 3300,3715 3125,3715 3095,3685 3095,3520 3050,3475 2915,3475 2875,3515 2875,3600 2855,3620 2855,3635 2845,3635 2790,3580 2425,3580 2385,3540 2385,3485 2550,3320 2550,3215 2510,3175 2280,3175 2200,3095 1785,3095 1760,3070 1760,2940
  region net +VBB: 2630,3280 2630,2975 2575,2920 2575,2755 2545,2725 2350,2725 2315,2690 2315,2570 2335,2550 2435,2550 2525,2640 2695,2640 2730,2675 2730,3280 2710,3300 2650,3300
  region net VIN: 1835,3615 2045,3615 2115,3685 2240,3685 2260,3665 2260,3270 2330,3200 2500,3200 2530,3230 2530,3315 2370,3475 2370,3545 2425,3600 2590,3600 2615,3625 2615,3760 2555,3820 2025,3820 1950,3745 1870,3745 1820,3695 1820,3630
  region net NetD9_1: 3925,2975 3965,2935 3965,2570 3945,2550 3770,2550 3745,2575 3745,2935 3785,2975
  region net PGND: 3825,3010 3945,3010 4000,2955 4000,2575 4025,2550 4150,2550 4175,2575 4175,3130 4175,3110 4130,3155 3845,3155 3800,3110 3800,3035
  region net NetD7_2: 5055,2955 5125,3025 5125,3160 5145,3180 5230,3180 5250,3160 5250,2885 5175,2810 4690,2810 4660,2840 4660,2930 4685,2955
  region net +FB: 5800,2300 5935,2435 5935,3035 6055,3155 6285,3155 6310,3180 6310,3275 6275,3310 5855,3310 5790,3245 5790,2735 5695,2640 5435,2640 5380,2585 5380,2335 5415,2300
  region net -FB: 5785,1795 5810,1770 5995,1770 6030,1805 6030,2155 6200,2325 6200,2725 6310,2835 6310,2905 6270,2945 6110,2945 6060,2895 6060,2375 5860,2175 5860,2025 5785,1950
  region net NetC5_2: 5005,3410 5165,3250 5230,3250 5255,3275 5255,3530 5210,3575 4710,3575 4675,3540 4675,3445 4710,3410
  region net NetD1_1: 5050,3610 5075,3635 5075,3725 5045,3755 4695,3755 4670,3730 4670,3630 4690,3610
  region net NetD1_2: 5170,3625 5125,3670 5125,3915 5165,3955 5435,3955 5465,3925 5465,3840 5250,3625
  region net +20V: 5865,3645 6050,3460 6095,3460 6115,3480 6115,3765 6090,3790 5455,3790 5385,3720 5385,3670 5410,3645
  region net NetD4_2: 5370,3540 5465,3540 5560,3445 5680,3445 5720,3405 5720,3115 5670,3065 5385,3065 5350,3100 5350,3150 5475,3275 5475,3335 5350,3460 5350,3520
  region net NetF1_1: 1825,3590 1800,3615 1800,3695 1870,3765 1945,3765 2045,3865 2140,3865 2155,3880 2155,4000 2140,4015 1870,4015 1845,3990 1845,3905 1815,3875 1690,3875 1650,3835 1650,3520 1705,3465 1950,3465 1980,3495 1980,3570 1960,3590
  region net NetD15_2: 1840,3430 1975,3430 2010,3465 2205,3465 2235,3435 2235,3350 2200,3315 1840,3315 1815,3340 1815,3405
  region net NetD15_3: 1840,3285 2200,3285 2235,3250 2235,3155 2200,3120 1845,3120 1815,3150 1815,3260
  region net NetD5_1: 5265,2955 5420,2800 5695,2800 5730,2835 5730,2975 5670,3035 5385,3035 5335,3085 5335,3165 5450,3280 5450,3325 5415,3360 5375,3360 5265,3250
Multi-Layer:
  region: 6340,3910 6140,3910 6140,4110 6240,4110 cw(c6240,4010) 6340,4010
  region: 6340,1735 6140,1735 6140,1535 6240,1535 ccw(c6240,1635) 6340,1635
  region: 1600,1735 1800,1735 1800,1535 1700,1535 cw(c1700,1635) 1600,1635
  region: 1600,3910 1800,3910 1800,4110 1700,4110 ccw(c1700,4010) 1600,4010

## Silkscreen, mask and mechanical layers (free items; w line width, h text height)
Top Overlay:
  text "ON/OFF" at 1610,3752.91 h47.24 r270
  text "AC INI" at 1609.98,3362.05 h47.24 r270
  text "GND / PGND / +BOOTS / VBAT" at 1610,3079.47 h47.24 r270
  text "VCC / -12V / +12V / +20V" at 1610,2342.12 h47.24 r270

## Dimensions
1600,1635 to 6340,1635 on Keep-Out Layer
1700,4110 to 1700,1535 on Keep-Out Layer

## Text inside footprints (layer, text, board x,y; h text height)
C2: Top Overlay "+" at 5770,3655 h60 r270
C7: Top Overlay "+" at 5730,2395 h60 r90
C8: Top Overlay "+" at 5095,2505 h60 r270
C11: Top Overlay "+" at 6095,2105 h60 r270
C13: Top Overlay "+" at 4870,1655 h60 r270
C24: Top Overlay "+" at 2445,1680 h60 r270
C26: Top Overlay "+" at 2580,3720 h60 r90
C27: Top Overlay "+" at 2695,2915 h60